# Altium PCB CS301_YOURGROUPNUM.PcbDoc
Units mm, origin at the board's own origin, x right, y up, seen from the top; angles counter-clockwise.
Board outline 87.88 x 127 mm, 2 copper layers (Top Layer, Bottom Layer); 64 components, 42 nets, 198 pads, 0 vias.
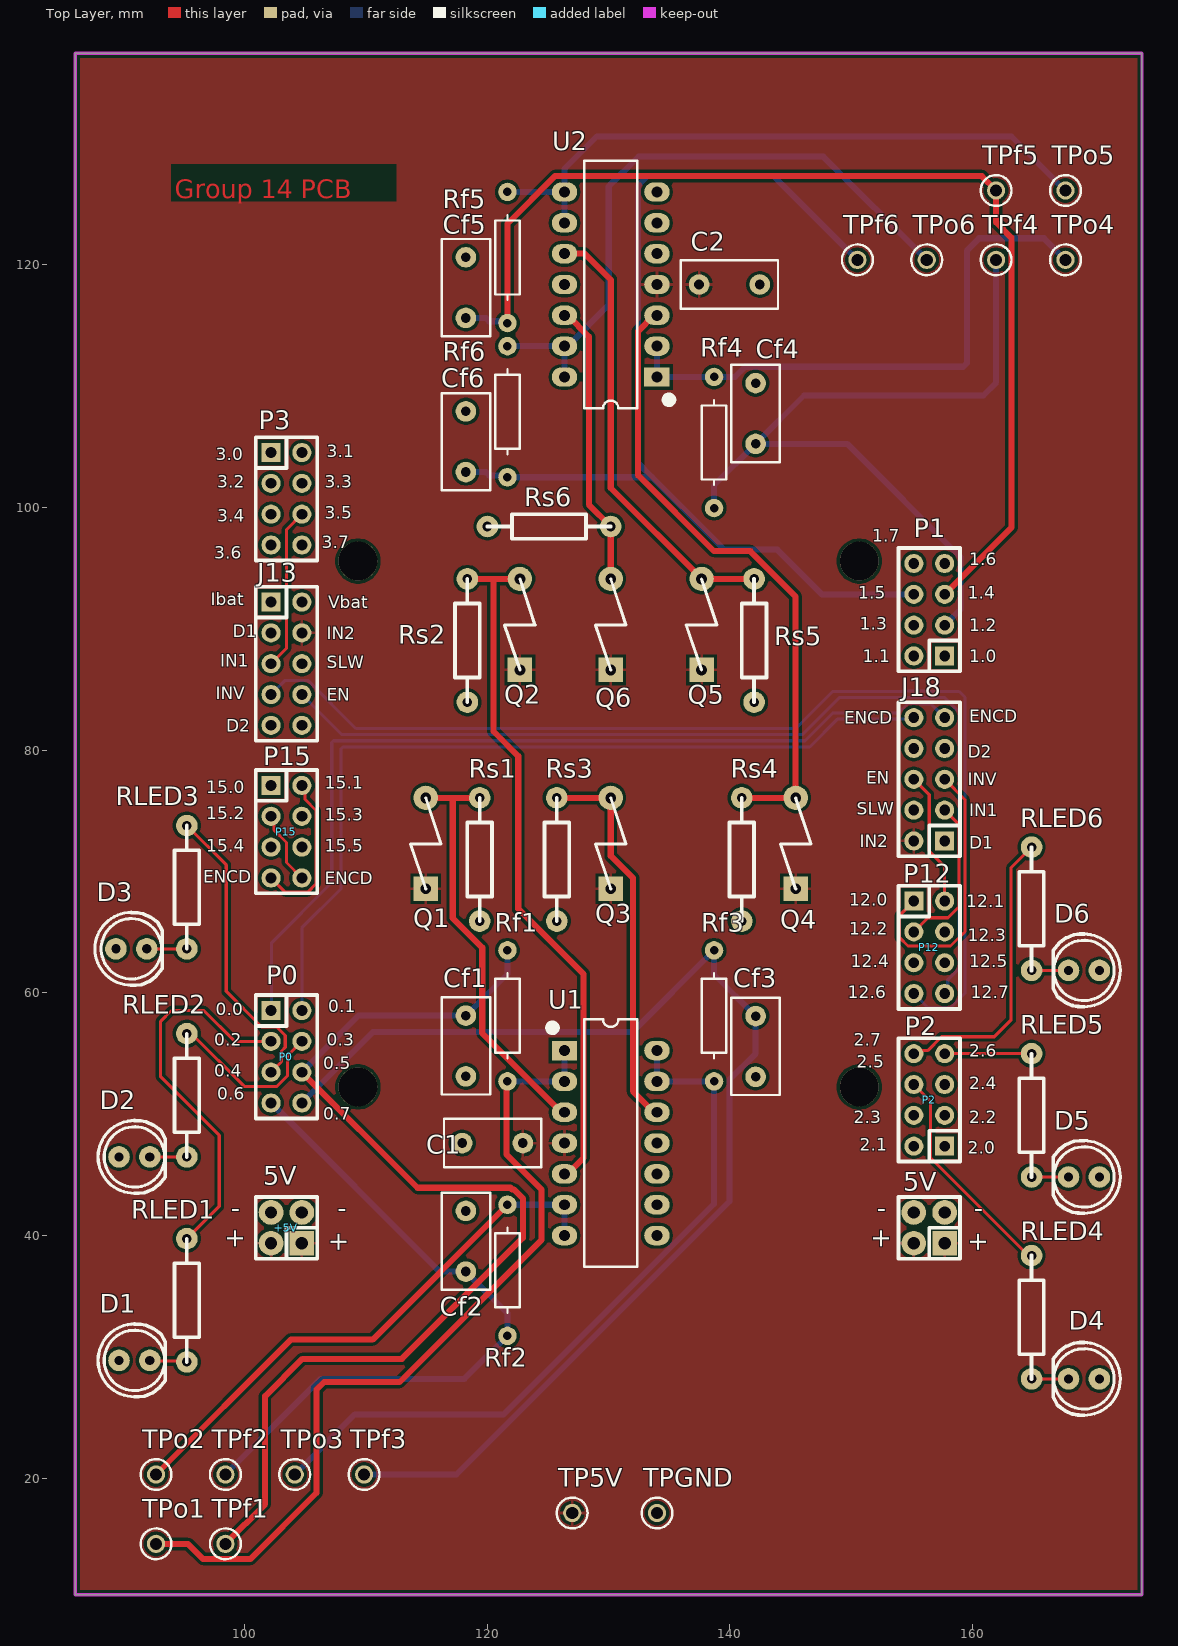
[diagram p0: Top Layer view]
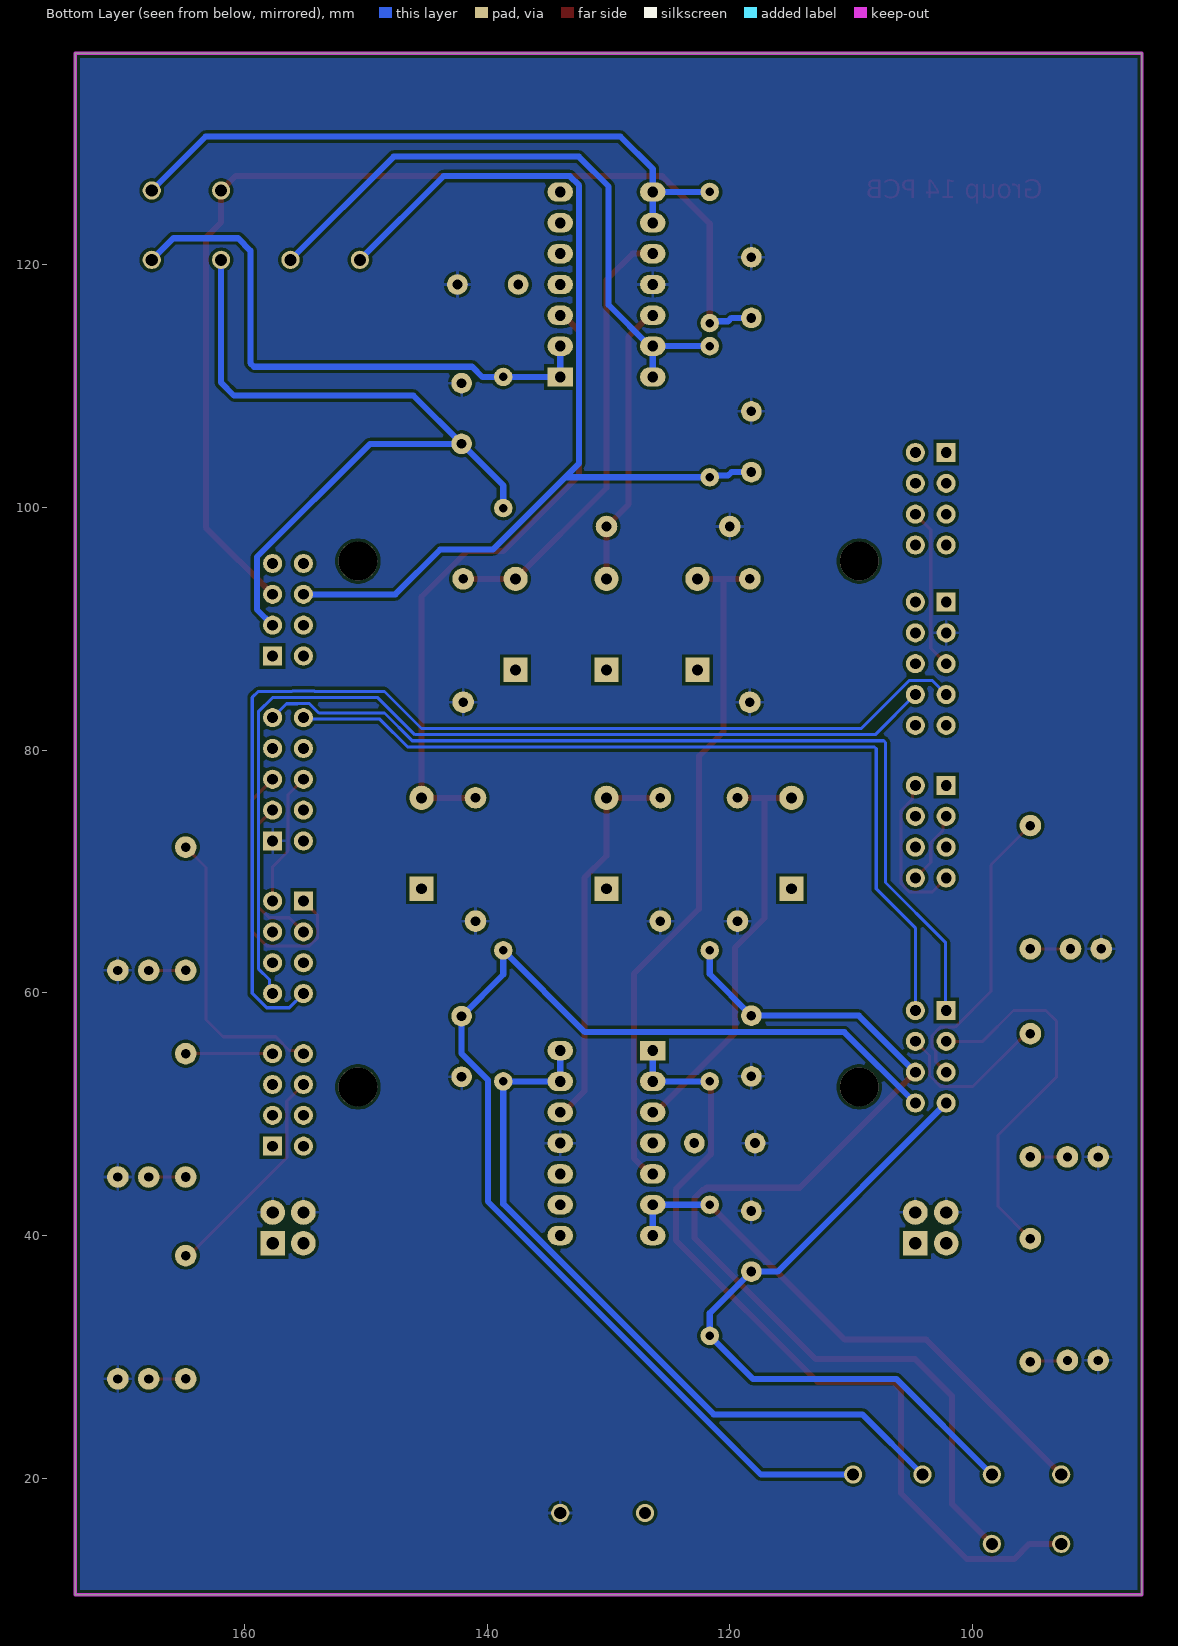
[diagram p1: Bottom Layer view, seen from below]

## Layer stack, top to bottom
Top Solder: solder mask 0.0102, Solder Resist, Dk 3.5
Top Layer: signal copper 0.0356
Dielectric 1: dielectric 0.32, FR-4, Dk 4.8
Bottom Layer: signal copper 0.0356
Bottom Solder: solder mask 0.0102, Solder Resist, Dk 3.5

## Board outline
86.058,10.414 173.942,10.414 173.942,137.414 86.058,137.414

## Design rules (kind name [scope] priority, off if disabled: settings)
Clearance [All] p1: gap=0.254 ignorepadtopadclearanceinfootprint=FALSE
PolygonConnect [All] p1: connectstyle=Relief reliefconductorwidth=0.254 reliefentries=4 polygonreliefangle="90 Angle" airgapwidth=0.254
RoutingVias [All] p1: holewidth=0.711 width=1.27 viastyle="Through Hole" minholewidth=0.711 minwidth=1.27 maxholewidth=0.711 maxwidth=1.27
SolderMaskExpansion [All] p1: expansion=0 istentingtop=FALSE
SupplyNets "Schematic Supply Nets_36" [InNet('Vsf4')] p1: voltage=0.000
SupplyNets "Schematic Supply Nets_35" [InNet('RWIN')] p2: voltage=0.000
SupplyNets "Schematic Supply Nets_34" [InNet('GND')] p3: voltage=0.000
SupplyNets "Schematic Supply Nets_33" [InNet('LED3')] p4: voltage=0.000
SupplyNets "Schematic Supply Nets_32" [InNet('Vsf6')] p5: voltage=0.000
SupplyNets "Schematic Supply Nets_31" [InNet('LWE')] p6: voltage=0.000
SupplyNets "Schematic Supply Nets_30" [InNet('LWCD1')] p7: voltage=0.000
SupplyNets "Schematic Supply Nets_29" [InNet('Vs5')] p8: voltage=0.000
SupplyNets "Schematic Supply Nets_28" [InNet('Vs3')] p9: voltage=0.000
SupplyNets "Schematic Supply Nets_27" [InNet('Vsf5')] p10: voltage=0.000
SupplyNets "Schematic Supply Nets_26" [InNet('+5V')] p11: voltage=0.000
SupplyNets "Schematic Supply Nets_25" [InNet('RWCD2')] p12: voltage=0.000
SupplyNets "Schematic Supply Nets_24" [InNet('LWCD2')] p13: voltage=0.000
SupplyNets "Schematic Supply Nets_23" [InNet('Vso5')] p14: voltage=0.000
SupplyNets "Schematic Supply Nets_22" [InNet('Vs2')] p15: voltage=0.000
SupplyNets "Schematic Supply Nets_21" [InNet('LED4')] p16: voltage=0.000
SupplyNets "Schematic Supply Nets_20" [InNet('LED5')] p17: voltage=0.000
SupplyNets "Schematic Supply Nets_19" [InNet('Vso3')] p18: voltage=0.000
SupplyNets "Schematic Supply Nets_18" [InNet('Vso4')] p19: voltage=0.000
SupplyNets "Schematic Supply Nets_17" [InNet('Vs4')] p20: voltage=0.000
SupplyNets "Schematic Supply Nets_16" [InNet('RWCD1')] p21: voltage=0.000
SupplyNets "Schematic Supply Nets_15" [InNet('Vs1')] p22: voltage=0.000
SupplyNets "Schematic Supply Nets_14" [InNet('RWE')] p23: voltage=0.000
SupplyNets "Schematic Supply Nets_13" [InNet('Vsf2')] p24: voltage=0.000
SupplyNets "Schematic Supply Nets_12" [InNet('LWV')] p25: voltage=0.000
SupplyNets "Schematic Supply Nets_11" [InNet('RWV')] p26: voltage=0.000
SupplyNets "Schematic Supply Nets_10" [InNet('LED6')] p27: voltage=0.000
SupplyNets "Schematic Supply Nets_9" [InNet('Vsf3')] p28: voltage=0.000
SupplyNets "Schematic Supply Nets_7" [InNet('LWIN')] p29: voltage=0.000
SupplyNets "Schematic Supply Nets_6" [InNet('LED2')] p30: voltage=0.000
SupplyNets "Schematic Supply Nets_5" [InNet('Vso6')] p31: voltage=0.000
SupplyNets "Schematic Supply Nets_4" [InNet('Vsf1')] p32: voltage=0.000
SupplyNets "Schematic Supply Nets_3" [InNet('Vs6')] p33: voltage=0.000
SupplyNets "Schematic Supply Nets_2" [InNet('Vso2')] p34: voltage=0.000
SupplyNets "Schematic Supply Nets_1" [InNet('LED1')] p35: voltage=0.000
SupplyNets "Schematic Supply Nets" [InNet('Vso1')] p36: voltage=0.000
Width [All] p1: maxlimit=0.508 minlimit=0.254 preferedwidth=0.254 minimp=50.000000 maximp=50.000000 favimp=50.000000
30 further rules are at their usual default settings.

## Components (designator, comment, footprint, x,y, rotation, side; value= is the part's Value field where it differs from the comment)
5V "5V" IDC4 157.686,39.37 r90 top locked
+5V "5V" IDC4 104.727,39.37 r90 top locked
C1 "100nF" CCAP-5P0 120.436,47.625 r180 top
C2 "100nF" CCAP-5P0 139.954,118.364 r0 top
Cf1 "10uf" CCAP-5P0 118.237,55.626 r270 top
Cf2 "*" CCAP-5P0 118.237,39.537 r90 top
Cf3 "*" CCAP-5P0 142.113,55.586 r270 top
Cf4 "*" CCAP-5P0 142.113,107.736 r90 top
Cf5 "*" CCAP-5P0 118.237,118.11 r90 top
Cf6 "*" CCAP-5P0 118.237,105.41 r90 top
D1 "LED" LED0.1/5MM 92.202,29.718 r270 top
D2 "LED" LED0.1/5MM 92.202,46.482 r270 top
D3 "LED" LED0.1/5MM 91.948,63.627 r270 top
D4 "LED" LED0.1/5MM 167.894,28.194 r90 top
D5 "LED" LED0.1/5MM 167.894,44.831 r90 top
D6 "LED" LED0.1/5MM 167.894,61.849 r90 top
J13 "CON10" IDC10 102.187,92.202 r270 top locked
J18 "CON10" IDC10 157.686,72.517 r90 top locked
P0 "P0" idc8 102.187,58.547 r270 top locked
P1 "P1" idc8 157.686,87.757 r90 top locked
P2 "P2" idc8 157.686,47.371 r90 top locked
P3 "P3" idc8 102.187,104.521 r270 top locked
P12 "P12" idc8 155.146,67.564 r270 top locked
P15 "P15" IDC8 102.187,77.089 r270 top locked
Q1 "VEMT3700" VEMT3700 118.745,66.04 r90 top
Q2 "VEMT3700" VEMT3700 126.492,84.074 r90 top
Q3 "VEMT3700" VEMT3700 133.985,66.04 r90 top
Q4 "VEMT3700" VEMT3700 149.225,66.04 r90 top
Q5 "VEMT3700" VEMT3700 141.478,84.074 r90 top
Q6 "VEMT3700" VEMT3700 133.985,84.074 r90 top
Rf1 "3.3.k" AXIAL-0.4 121.666,58.105 r90 top
Rf2 "*" AXIAL-0.4 121.666,37.145 r270 top
Rf3 "*" AXIAL-0.4 138.684,58.105 r90 top
Rf4 "*" AXIAL-0.4 138.684,105.344 r270 top
Rf5 "*" AXIAL-0.4 121.666,120.589 r270 top
Rf6 "*" AXIAL-0.4 121.666,107.884 r270 top
RLED1 "1k" AXIAL0.4 95.25,39.751 r270 top
RLED2 "1k" AXIAL0.4 95.25,56.642 r270 top
RLED3 "1k" AXIAL0.4 95.25,73.787 r270 top
RLED4 "1k" AXIAL0.4 164.846,38.354 r270 top
RLED5 "1k" AXIAL0.4 164.846,54.991 r270 top
RLED6 "1k" AXIAL0.4 164.846,72.009 r270 top
Rs1 "50k" AXIAL0.4 119.38,76.073 r270 top
Rs2 "50k" AXIAL0.4 118.364,94.107 r270 top
Rs3 "50k" AXIAL0.4 125.73,76.073 r270 top
Rs4 "50k" AXIAL0.4 140.97,76.073 r270 top
Rs5 "50k" AXIAL0.4 141.986,94.107 r270 top
Rs6 "50k" AXIAL0.4 130.175,98.425 r180 top
TP5V "5003" TP_TH 127,17.145 r90 top
TPf1 "5003" TP_TH 98.425,14.605 r90 top
TPf2 "5003" TP_TH 98.425,20.32 r90 top
TPf3 "5003" TP_TH 109.855,20.32 r90 top
TPf4 "5003" TP_TH 161.925,120.396 r90 top
TPf5 "5003" TP_TH 161.925,126.111 r90 top
TPf6 "5003" TP_TH 150.495,120.396 r90 top
TPGND "5003" TP_TH 133.985,17.145 r90 top
TPo1 "5003" TP_TH 92.71,14.605 r90 top
TPo2 "5003" TP_TH 92.71,20.32 r90 top
TPo3 "5003" TP_TH 104.14,20.32 r90 top
TPo4 "5003" TP_TH 167.64,120.396 r90 top
TPo5 "5003" TP_TH 167.64,126.111 r90 top
TPo6 "5003" TP_TH 156.21,120.396 r90 top
U1 "LM324" DIP-14 130.175,47.625 r0 top
U2 "LM324" DIP-14 130.175,118.364 r180 top

## Footprints (in the part's own frame and the unit in brackets; to place one, negate y for a bottom-side part, rotate by r counter-clockwise, add the part's x,y. Pads: shape width x height; smd on the part's side, far side on the other; paste and mask are expansions set on the pad)
AXIAL0.4 [mil]
  round 70 hole 31: 1(0,0) 2(400,0)
  silkscreen extent 0,-40 400,40
AXIAL-0.4 [mm]
  round 1.524 hole 0.7: 1(-5.4,0) 2(5.4,0)
  silkscreen extent -3.5,-1.02 3.5,1.02, body extent -5.7,-1.3 5.7,1.3, height 2.7
CCAP-5P0 [mm]
  round 1.7 hole 0.8: 1(-2.5,0) 2(2.5,0)
  silkscreen extent -4,-2 4,2, body extent -3.25,-1.5 3.25,1.5, height 6.5
DIP-14 [mm] "DIP; 14 Leads; Row Spacing 7.62 mm; Pitch 2.54 mm"
  rect 2.1x1.6 hole 0.9: 1(-3.81,7.62)
  oval 2.1x1.6 hole 0.9: 2(-3.81,5.08) 3(-3.81,2.54) 4(-3.81,0) 5(-3.81,-2.54) 6(-3.81,-5.08) 7(-3.81,-7.62) 8(3.81,-7.62) 9(3.81,-5.08) 10(3.81,-2.54) 11(3.81,0) 12(3.81,2.54) 13(3.81,5.08) 14(3.81,7.62)
  silkscreen extent -5.1,-10.2 2.2,10.2, body extent -5.07,-10.2 5.09,10.12, height 9.47
IDC4 [mil]
  rect 80x80 hole 40: 1(0,0)
  round 80 hole 40: 2(0,100) 3(100,0) 4(100,100)
  silkscreen extent -50,-50 150,150
idc8 [mil]
  rect 62x62 hole 35: 1(0,0)
  round 62 hole 35: 2(0,100) 3(100,0) 4(100,100) 5(200,0) 6(200,100) 7(300,0) 8(300,100)
  silkscreen extent -50,-50 350,150
IDC8 [mil]
  rect 62x62 hole 35: 1(0,0)
  round 62 hole 35: 2(0,100) 3(100,0) 4(100,100) 5(200,0) 6(200,100) 7(300,0) 8(300,100)
  silkscreen extent -50,-50 350,150
IDC10 [mil]
  rect 62x62 hole 35: 1(0,0)
  round 62 hole 35: 2(0,100) 3(100,0) 4(100,100) 5(200,0) 6(200,100) 7(300,0) 8(300,100) 9(400,0) 10(400,100)
  silkscreen extent -50,-50 450,150
LED0.1/5MM [mil]
  round 70 hole 30: A(0,0) K(0,-100)
  silkscreen extent -118,-168 118,50
TP_TH [mm] "Test Point, Through Hole, Dia 2.54mm"
  round 1.5 hole 1: 1(0,0)
  silkscreen extent -1.27,-1.27 1.27,1.27, body extent -1.27,-1.27 1.27,1.27, height 4.57
VEMT3700 [mm]
  rect 2x2 hole 0.9: 1(2.54,3.81)
  round 2 hole 0.9: 2(10.033,3.81)
  silkscreen extent 2.54,2.54 10.03,5.08

## Part data
5V +5V: library part CON4, "Connector"
C1 C2 Cf1 Cf2 Cf3 Cf4 Cf5 Cf6: library part CerCap_TH_5P0, "TH ceramic capacitor with 5mm pitch"
J13 J18: "Connector"
P0 P1 P2 P3: library part CON8, "Connector"
P12 P15: library part CON8_1, "Connector"
Q1 Q2 Q3 Q4 Q5 Q6: "Silicon NPN Phototransistor"
Rf1 Rf2 Rf3 Rf4 Rf5 Rf6: library part Res_TH_0AX4, "Through hole resistor", ComponentLink1Description=http://www.royalohm.com/pdf/product2017/PrecisionMetalMF.pdf, LatestRevisionDate=17-Jul-2002, LatestRevisionNote="Re-released for DXP Platform.", PackageReference=AXIAL-0.4, Published=8-Jun-2000, Publisher="Altium Limited"
RLED1 RLED2 RLED3 RLED4 RLED5 RLED6 Rs1 Rs2 Rs3 Rs4 Rs5 Rs6: library part RES2
TP5V TPf1 TPf2 TPf3 TPf4 TPf5 TPf6 TPGND TPo1 TPo2 TPo3 TPo4 TPo5 TPo6: library part TestPoint, "Test Point, Orange, 1-Pin THD, RoHS", Forward Current="3 A", Forward Voltage="1.08 V", Max Operating Temperature="150 degC", Max Surge Current="80 A", Min Operating Temperature="-65 degC", Package Quantity=500, Peak Reverse Current="600 uA", ComponentLink1Description="Manufacturer URL", ComponentLink1URL=http://www.keyelco.com/, ComponentLink2Description=Datasheet, ComponentLink2URL=http://keyelco.com/userAssets/file/M65p56.pdf, DatasheetVersion=Jun-15, Diameter="5.3 mm", Height="0.25 inch", Length="9.5 mm", Mount="Through Hole", PackageDescription="1-Pin Through Hole Device, Dia 2.54 mm", PackageReference=5003, Packaging=Bulk, Pins=2, Radiation Hardening=No, REACH SVHC="No SVHC", RoHSCompliant=true, Weight="0.01 lb", Width="0.25 inch"
U1 U2: library part LM324N_TH_DIP16, "IC OPAMP GP 14DIP", Current - Supply=1mA, Manufacturer="ON Semiconductor", Manufacturer Part Number=LM324N, Operating Temperature="0°C ~ 70°C", Package / Case="14-DIP (0.300\", 7.62mm)", Supplier Device Package=14-DIP, Supplier Part Number 1=LM324NFS-ND, Voltage - Supply, Single/Dual (±)="3 V ~ 32 V, ±1.5 V ~ 16 V", Amplifier Type="General Purpose", Base Part Number=LM324, Category="Integrated Circuits (ICs)", ComponentLink1Description=https://www.fairchildsemi.com/datasheets/LM/LM2902.pdf, ComponentLink1URL=https://www.fairchildsemi.com/datasheets/LM/LM2902.pdf, Mounting Type="Through Hole", Output Type=-, Packaging=Tube, Part Status=Active, Pricing 1="1=0.9, 10=0.775, 100=0.5789, 500=0.45482, 1000=0.35145 (NZD)", RoHS="RoHS Compliant", Slew Rate=-, Stock 1=2900, Supplier 1=Digi-Key

## Free pads (board coordinates)
  round 3.2 hole 3.2 unplated: 1(109.35,52.248) 1(109.35,95.58) 1(150.65,52.248) 1(150.65,95.58)

## Nets (pads, with @x,y where several pads share a name; then routed paths per layer and width w, separated by ;. In a path a pad name is that pad's centre, name@x,y a point inside that pad or via, vN(x,y) a via of type N, cw(c..) or ccw(c..) an arc to the next point about the centre after c; other vN are vias at no path point)
+5V: 5V.1 5V.2 +5V.1 +5V.2 C1.1 C2.1 J13.4 J18.2 Q1.1 Q2.1 Q3.1 Q4.1 Q5.1 Q6.1 TP5V.1 U1.4 U2.4
GND: 5V.3 5V.4 +5V.3 +5V.4 C1.2 C2.2 Cf1.2 Cf2.2 Cf3.2 Cf4.2 Cf5.2 Cf6.2 D1.K D2.K D3.K D4.K D5.K D6.K J13.3 J18.1 Rs1.2 Rs2.2 Rs3.2 Rs4.2 Rs5.2 Rs6.2 TPGND.1 U1.11 U2.11
LED1: P0.3 RLED1.1 | length 31.5
  Top Layer w0.254: RLED1.1 97.917,42.418 97.917,48.26 93.091,53.086 93.091,57.658 93.98,58.547 96.647,58.547 99.187,56.007 P0.3
LED2: P0.4 RLED2.1 | length 13.8
  Top Layer w0.254: RLED2.1 95.631,56.642 99.974,52.299 102.671,52.299 103.559,53.186 103.559,54.839 P0.4
LED3: P0.5 RLED3.1 | length 24.9
  Top Layer w0.254: RLED3.1 98.493,70.544 98.493,60.127 101.445,57.175 102.671,57.175 103.355,56.491 103.355,55.523 103.051,55.218 103.051,54.331 P0.5
LED4: P2.6 RLED4.1 | length 18.3
  Top Layer w0.254: P2.6 156.518,51.079 156.518,46.426 164.589,38.354 RLED4.1
LED5: P2.7 RLED5.1 | length 7.2
  Top Layer w0.254: P2.7 RLED5.1
LED6: P2.8 RLED6.1 | length 24.1
  Top Layer w0.254: P2.8 155.399,55.244 156.286,55.244 157.431,56.388 161.776,56.388 163.165,57.777 163.165,70.328 RLED6.1
LWCD1: P15.2 P15.7 | length 13.1
  Top Layer w0.254: P15.7 103.355,68.301 105.211,68.301 105.895,68.985 105.895,75.033 104.98,75.949 104.98,76.836 P15.2
LWCD2: P15.3 P15.8 | length 6.1
  Top Layer w0.254: P15.3 102.44,74.296 102.44,73.409 103.457,72.391 103.457,70.739 P15.8
LWE: J13.8 P12.8 | length 81
  Bottom Layer w0.254: J13.8 108.029,81.28 145.967,81.28 149.015,84.328 154.426,84.328 154.452,84.353 155.84,84.353 155.866,84.328 157.687,84.328 158.854,83.161 158.854,62 157.939,61.084 157.939,60.197 P12.8
LWIN: J13.5 P3.6 | length 13.4
  Top Layer w0.254: J13.5 103.457,88.392 103.457,98.171 P3.6
LWV: J13.7 P12.7 | length 90.4
  Bottom Layer w0.254: J13.7 103.355,85.75 105.211,85.75 109.173,81.788 145.415,81.788 148.463,84.836 154.216,84.836 154.241,84.861 156.051,84.861 156.076,84.836 158.877,84.836 159.362,84.351 159.362,59.968 158.17,58.776 156.314,58.776 P12.7
NetD1_A: D1.A RLED1.2 | length 3.1
  Top Layer w0.254: D1.A 92.266,29.654 95.186,29.654 RLED1.2
NetD2_A: D2.A RLED2.2 | length 3
  Top Layer w0.254: D2.A RLED2.2
NetD3_A: D3.A RLED3.2 | length 3.3
  Top Layer w0.254: D3.A RLED3.2
NetD4_A: D4.A RLED4.2 | length 3
  Top Layer w0.254: RLED4.2 D4.A
NetD5_A: D5.A RLED5.2 | length 3
  Top Layer w0.254: RLED5.2 D5.A
NetD6_A: D6.A RLED6.2 | length 3
  Top Layer w0.254: RLED6.2 D6.A
RWCD1: J18.9 P0.1 | length 76.5
  Bottom Layer w0.254: P0.1 102.235,58.595 102.235,64.135 107.188,69.088 107.188,80.623 107.337,80.772 146.177,80.772 148.463,83.058 153.875,83.058 154.662,83.845 155.63,83.845 155.655,83.82 156.543,83.82 J18.9
RWCD2: J18.10 P0.2 | length 71.2
  Bottom Layer w0.254: P0.2 104.727,65.357 107.95,68.58 107.95,80.115 108.099,80.264 146.558,80.264 148.844,82.55 155.019,82.55 J18.10
RWE: J18.6 P12.2 | length 11.1
  Top Layer w0.254: J18.6 156.416,76.327 156.416,71.673 157.686,70.403 P12.2
RWIN: J18.3 P12.3 | length 13
  Top Layer w0.254: P12.3 156.314,66.192 157.967,66.192 158.854,67.08 158.854,73.889 J18.3
RWV: J18.5 P12.1 | length 22.9
  Top Layer w0.254: P12.1 153.978,66.396 153.978,64.54 154.662,63.856 158.17,63.856 159.362,65.048 159.362,75.921 J18.5
Vs1: Q1.2 Rs1.1 U1.3 | length 34.3
  Top Layer w0.5: Q1.2 117.157,76.073 ; Rs1.1 117.157,76.073 ; U1.3 126.115,50.165 119.591,56.689 119.591,63.732 117.157,66.166 117.157,76.073
Vs2: Q2.2 Rs2.1 U1.5 | length 57.2
  Top Layer w0.5: Rs2.1 120.523,94.107 ; Q2.2 120.523,94.107 ; U1.5 126.615,45.085 127.919,46.389 127.919,61.565 122.555,66.929 122.555,79.502 120.523,81.534 120.523,94.107
Vs3: Q3.2 Rs3.1 U1.12 | length 32.1
  Top Layer w0.5: Rs3.1 Q3.2 130.175,71.293 131.993,69.474 131.993,51.907 133.735,50.165 U1.12
Vs4: Q4.2 Rs4.1 U2.3 | length 52.1
  Top Layer w0.5: U2.3 133.735,115.824 132.431,114.52 132.431,102.646 138.684,96.393 141.67,96.393 145.415,92.648 Q4.2 Rs4.1
Vs5: Q5.2 Rs5.1 U2.10 | length 36.8
  Top Layer w0.5: U2.10 128.016,120.904 130.175,118.745 130.175,101.6 Q5.2 Rs5.1
Vs6: Q6.2 Rs6.1 U2.12 | length 23.4
  Top Layer w0.5: U2.12 126.615,115.824 128.378,114.061 128.378,100.222 Rs6.1 Q6.2
Vsf1: Cf1.1 P0.6 Rf1.2 TPf1.1 | length 88.2
  Top Layer w0.5: TPf1.1 101.696,17.876 101.696,26.766 104.775,29.845 112.96,29.845 122.932,39.817 122.932,43.069 122.19,43.811 122.051,43.811 121.92,43.942 114.252,43.942 P0.6
  Bottom Layer w0.5: P0.6 109.386,58.126 Cf1.1 121.666,61.555 Rf1.2
Vsf2: Cf2.1 P0.7 Rf2.2 TPf2.1 | length 56.5
  Bottom Layer w0.5: TPf2.1 106.299,28.194 118.115,28.194 Rf2.2 121.666,33.608 Cf2.1
  Bottom Layer w0.508: P0.7 116.077,37.037 Cf2.1
Vsf3: Cf3.1 P0.8 Rf3.2 TPf3.1 | length 101.6
  Bottom Layer w0.5: P0.8 110.572,56.772 131.951,56.772 Rf3.2 138.684,61.515 Cf3.1 142.113,55.001 139.95,52.838 139.95,42.81 117.46,20.32 TPf3.1
Vsf4: Cf4.1 P1.3 Rf4.2 TPf4.1 | length 65.6
  Bottom Layer w0.5: Rf4.2 138.684,101.807 Cf4.1 ; P1.3 158.977,91.588 158.977,95.912 149.653,105.236 Cf4.1 ; TPf4.1 161.925,110.275 160.87,109.22 146.097,109.22 Cf4.1
Vsf5: Cf5.1 P1.5 Rf5.2 TPf5.1 | length 90.2
  Top Layer w0.5: Rf5.2 121.666,123.379 125.575,127.288 160.748,127.288 TPf5.1 161.925,123.485 163.179,122.231 163.179,98.33 P1.5
  Bottom Layer w0.5: Cf5.1 119.88,115.61 120.154,115.336 121.519,115.336 Rf5.2
Vsf6: Cf6.1 P1.6 Rf6.2 TPf6.1 | length 86.8
  Bottom Layer w0.5: Cf6.1 119.877,102.91 120.154,102.633 121.517,102.633 Rf6.2 133.576,102.484 ; TPf6.1 143.603,127.288 133.195,127.288 132.431,126.524 132.431,103.629 133.576,102.484 ; P1.6 147.574,92.837 143.891,96.52 139.54,96.52 133.576,102.484
Vso1: Rf1.1 TPo1.1 U1.1 U1.2 | length 69.7
  Top Layer w0.5: TPo1.1 95.336,14.605 96.59,13.351 100.473,13.351 105.918,18.796 105.918,27.305 106.553,27.94 112.776,27.94 124.46,39.624 124.46,43.815 121.582,46.693 121.582,52.621 Rf1.1
  Bottom Layer w0.5: Rf1.1 U1.2 U1.1
Vso2: Rf2.1 TPo2.1 U1.6 U1.7 | length 45.4
  Top Layer w0.5: TPo2.1 103.82,31.43 110.551,31.43 Rf2.1
  Bottom Layer w0.5: Rf2.1 U1.6 U1.7
Vso3: Rf3.1 TPo3.1 U1.13 U1.14 | length 61.1
  Bottom Layer w0.5: TPo3.1 109.096,25.276 121.35,25.276 138.684,42.61 Rf3.1 U1.13 U1.14
Vso4: Rf4.1 TPo4.1 U2.1 U2.2 | length 47.1
  Bottom Layer w0.5: U2.2 U2.1 Rf4.1 140.394,110.744 141.24,111.59 159.219,111.59 159.512,111.883 159.512,121.158 160.528,122.174 165.862,122.174 TPo4.1
Vso5: Rf5.1 TPo5.1 U2.8 U2.9 | length 55.9
  Bottom Layer w0.5: Rf5.1 121.668,125.986 126.363,125.986 U2.8 U2.9 126.365,125.986 126.365,127.889 129.032,130.556 163.195,130.556 TPo5.1
Vso6: Rf6.1 TPo6.1 U2.13 U2.14 | length 52.8
  Bottom Layer w0.5: Rf6.1 U2.13 ; U2.14 U2.13 ; TPo6.1 147.701,128.905 132.461,128.905 130.01,126.454 130.01,116.679 126.615,113.284 U2.13
pads on no net: J13.1 J13.2 J13.6 J13.9 J13.10 J18.4 J18.7 J18.8 P1.1 P1.2 P1.4 P1.7 P1.8 P2.1 P2.2 P2.3 P2.4 P2.5 P3.1 P3.2 P3.3 P3.4 P3.5 P3.7 P3.8 P12.4 P12.5 P12.6 P15.1 P15.4 P15.5 P15.6 U1.8 U1.9 U1.10 U2.5 U2.6 U2.7

## Polygon pours and split planes (outlines as drawn)
+5V on Top Layer "+5V_L01_P002" (solid, pour order 2): 86.058,137.414 173.942,137.414 173.942,10.414 86.058,10.414
GND on Bottom Layer "GND_L02_P003" (solid, pour order 3): 86.058,137.414 173.942,137.414 173.942,10.414 86.058,10.414

## Keep-outs
Keep-Out Layer:
  the board outline again, w0.254

## Other copper
Top Layer:
  text "Group 14 PCB" at 94.234,125.476 h1.52

## Silkscreen, mask and mechanical layers (free items; w line width, h text height)
Top Overlay:
  text "3.1" at 106.759,104.14 h1.02
  text "3.0" at 97.615,103.886 h1.02
  text "3.2" at 97.742,101.6 h1.02
  text "3.3" at 106.632,101.6 h1.02
  text "3.5" at 106.632,99.06 h1.02
  text "3.4" at 97.742,98.806 h1.02
  text "1.7" at 151.717,97.155 h1.02
  text "3.7" at 106.378,96.647 h1.02
  text "3.6" at 97.488,95.758 h1.02
  text "1.6" at 159.718,95.25 h1.02
  text "1.5" at 150.574,92.456 h1.02
  text "1.4" at 159.591,92.456 h1.02
  text "Ibat" at 97.234,91.948 h1.02
  text "Vbat" at 106.886,91.694 h1.02
  text "1.3" at 150.701,89.916 h1.02
  text "1.2" at 159.718,89.789 h1.02
  text "D1" at 99.012,89.281 h1.02
  text "IN2" at 106.759,89.154 h1.02
  text "1.1" at 150.955,87.249 h1.02
  text "1.0" at 159.718,87.249 h1.02
  text "IN1" at 97.996,86.868 h1.02
  text "SLW" at 106.759,86.741 h1.02
  text "INV" at 97.615,84.201 h1.02
  text "EN" at 106.759,84.074 h1.02
  text "ENCD" at 159.718,82.296 h1.02
  text "ENCD" at 149.431,82.169 h1.02
  text "D2" at 98.504,81.534 h1.02
  text "D2" at 159.591,79.375 h1.02
  text "EN" at 151.209,77.216 h1.02
  text "INV" at 159.591,77.089 h1.02
  text "15.1" at 106.632,76.835 h1.02
  text "15.0" at 96.853,76.454 h1.02
  text "SLW" at 150.447,74.676 h1.02
  text "IN1" at 159.718,74.549 h1.02
  text "15.2" at 96.853,74.295 h1.02
  text "15.3" at 106.632,74.168 h1.02
  text "IN2" at 150.701,72.009 h1.02
  text "D1" at 159.718,71.882 h1.02
  text "15.4" at 96.853,71.628 h1.02
  text "15.5" at 106.632,71.628 h1.02
  text "ENCD" at 96.599,69.088 h1.02
  text "ENCD" at 106.632,68.961 h1.02
  text "12.0" at 149.812,67.183 h1.02
  text "12.1" at 159.464,67.056 h1.02
  text "12.2" at 149.812,64.77 h1.02
  text "12.3" at 159.591,64.262 h1.02
  text "12.4" at 149.939,62.103 h1.02
  text "12.5" at 159.718,62.103 h1.02
  text "12.6" at 149.685,59.563 h1.02
  text "12.7" at 159.845,59.563 h1.02
  text "0.1" at 106.886,58.42 h1.02
  text "0.0" at 97.615,58.166 h1.02
  text "0.2" at 97.488,55.626 h1.02
  text "0.3" at 106.759,55.626 h1.02
  text "2.7" at 150.193,55.626 h1.02
  text "2.6" at 159.718,54.737 h1.02
  text "2.5" at 150.447,53.848 h1.02
  text "0.5" at 106.505,53.721 h1.02
  text "0.4" at 97.488,53.086 h1.02
  text "2.4" at 159.718,52.07 h1.02
  text "0.6" at 97.742,51.181 h1.02
  text "0.7" at 106.505,49.53 h1.02
  text "2.3" at 150.193,49.276 h1.02
  text "2.2" at 159.718,49.276 h1.02
  text "2.1" at 150.701,46.99 h1.02
  text "2.0" at 159.591,46.736 h1.02
  text "-" at 99.647,42.672 h1.52 r180
  text "-" at 108.41,42.672 h1.52 r180
  text "-" at 152.86,42.672 h1.52 r180
  text "-" at 160.861,42.672 h1.52 r180
  text "+" at 99.901,38.862 h1.52 r90
  text "+" at 153.114,38.862 h1.52 r90
  text "+" at 108.41,38.608 h1.52 r90
  text "+" at 161.115,38.608 h1.52 r90